# Altium PCB Unit_Type_C.PcbDoc
Units mm, origin at the board's own origin, x right, y up, seen from the top; angles counter-clockwise.
Board outline 20.6 x 43.8 mm, 2 copper layers (Top Layer, Bottom Layer), stack 0.98 mm thick; 1 components, 3 nets, 4 pads, 1 vias.
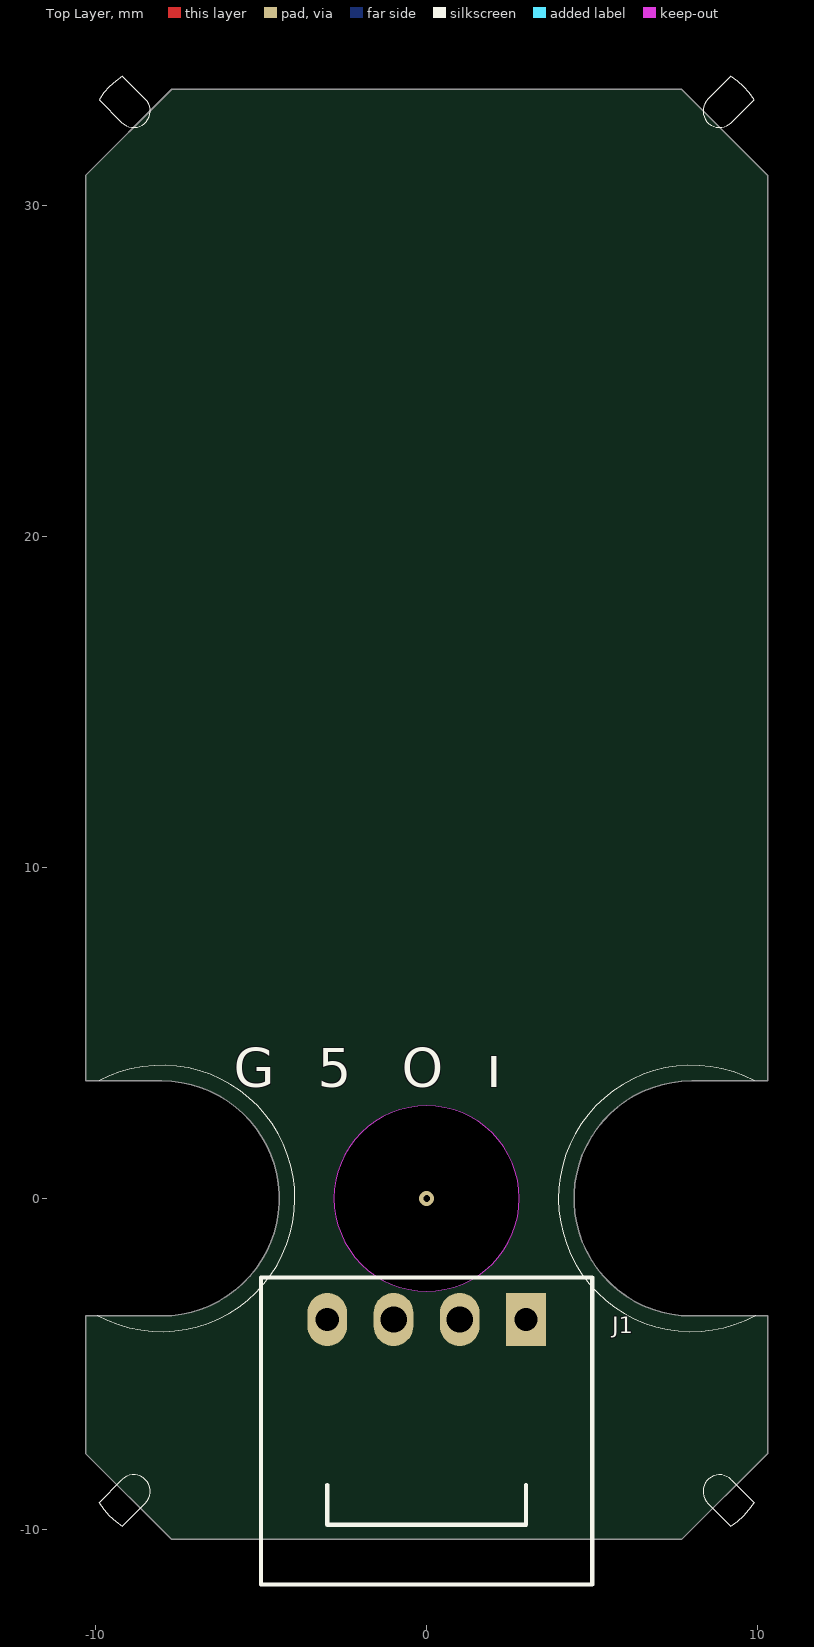
[diagram p0: Top Layer view]
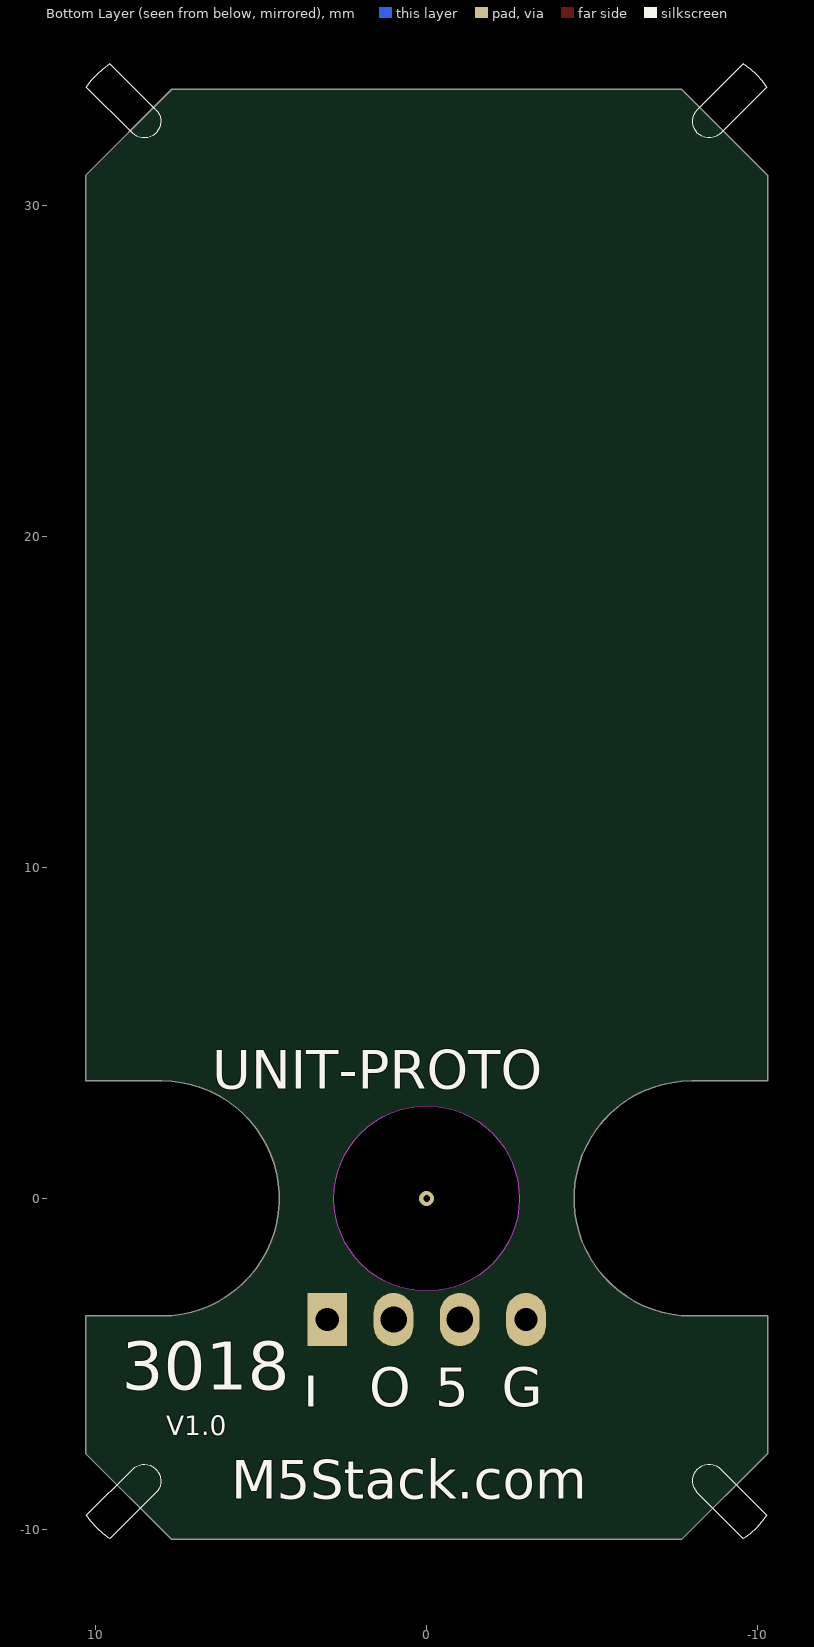
[diagram p1: Bottom Layer view, seen from below]

## Layer stack, top to bottom
Top Solder: solder mask 0.0102, Solder Resist, Dk 3.5
Top Layer: signal copper 0.0356
Dielectric 1: dielectric 0.9086, FR-4, Dk 4.8
Bottom Layer: signal copper 0.0356
Bottom Solder: solder mask 0.0102, Solder Resist, Dk 3.5

## Board outline
-10.3,-3.55 -8,-3.55 ccw(c-8,0) -8,3.55 -10.3,3.55 -10.3,30.9 -7.7,33.5 7.7,33.5 10.3,30.9 10.3,3.55 8,3.55 ccw(c8,0) 8,-3.55 10.3,-3.55 10.3,-7.7 7.7,-10.3 -7.7,-10.3 -10.3,-7.7
cut-out: -2.8,0 ccw(c0,0) 0,-2.8 ccw(c0,0) 2.8,0 ccw(c0,0) 0,2.8 ccw(c0,0)

## Design rules (kind name [scope] priority, off if disabled: settings)
Clearance [All] p1: gap=0.254 ignorepadtopadclearanceinfootprint=FALSE except(0: Arc-Hole Track-Hole SMDPad-Hole THPad-Hole Via-Hole Fill-Hole Poly-Hole Region-Hole Text-Hole)
PolygonConnect [All] p1: connectstyle=Relief reliefconductorwidth=0.254 reliefentries=4 polygonreliefangle="90 Angle" airgapwidth=0.254
RoutingVias [All] p1: holewidth=0.4 width=0.6 viastyle="Through Hole" minholewidth=0.3 minwidth=0.6 maxholewidth=0.4 maxwidth=0.7
SolderMaskExpansion [All] p1: expansion=0.102 istentingtop=FALSE
Width [InNet('No Net')] p1: maxlimit=0.254 minlimit=0.254 preferedwidth=0.254
30 further rules are at their usual default settings.

## Components (designator, comment, footprint, x,y, rotation, side; value= is the part's Value field where it differs from the comment)
J1 "Grove" Grove 0,-9.856 r270 top locked

## Footprints (in the part's own frame and the unit in brackets; to place one, negate y for a bottom-side part, rotate by r counter-clockwise, add the part's x,y. Pads: shape width x height; smd on the part's side, far side on the other; paste and mask are expansions set on the pad)
Grove [mm]
  rect 1.6x1.2 hole 0.7: 1(-6.2,3)
  oval 1.6x1.2 hole 0.8: 2(-6.2,1) 3(-6.2,-1)
  oval 1.6x1.2 hole 0.7: 4(-6.2,-3)
  silkscreen extent -7.47,-5 1.8,5, body extent -7.53,-5.06 1.86,5.06, height 5.1

## Via types
v1: diameter 0.45, hole 0.2, Top Layer to Bottom Layer, tented both sides, 1 vias

## Nets (pads, with @x,y where several pads share a name; then routed paths per layer and width w, separated by ;. In a path a pad name is that pad's centre, name@x,y a point inside that pad or via, vN(x,y) a via of type N, cw(c..) or ccw(c..) an arc to the next point about the centre after c; other vN are vias at no path point)
GND: J1.4
NetC1_2: J1.1
VCC: J1.3
pads on no net: J1.2
copper on no net:
  other v1: 0,0

## Silkscreen, mask and mechanical layers (free items; w line width, h text height)
Top Overlay:
  lines w0.013: -9.942,-3.522 ccw(c-8,0) -9.89,3.55 ; 9.89,3.55 ccw(c8,0) 9.942,-3.522 ; -9.894,-9.187 ccw(c-8,-8) -9.187,-9.894 -8.495,-9.202 ccw(c-8.849,-8.849) -9.202,-8.495 -9.894,-9.187 ; -9.894,33.187 cw(c-8,32) -9.187,33.894 -8.495,33.202 cw(c-8.849,32.849) -9.202,32.495 -9.894,33.187 ; 8.495,-9.202 cw(c8.849,-8.849) 9.202,-8.495 9.894,-9.187 cw(c8,-8) 9.187,-9.894 8.495,-9.202 ; 8.495,33.202 ccw(c8.849,32.849) 9.202,32.495 9.894,33.187 ccw(c8,32) 9.187,33.894 8.495,33.202
  text "G" at -5.826,2.988 h2
  text "5" at -3.286,2.988 h2
  text "O" at -0.746,2.988 h2
  text "I" at 1.794,2.988 h2
Bottom Overlay:
  lines w0.013: -10.275,-9.568 ccw(c-8,-8) -9.568,-10.275 -8.177,-8.884 ccw(c-8.53,-8.53) -8.884,-8.177 -10.275,-9.568 ; -10.275,33.568 cw(c-8,32) -9.568,34.275 -8.177,32.884 cw(c-8.53,32.53) -8.884,32.177 -10.275,33.568 ; 8.177,-8.884 cw(c8.53,-8.53) 8.884,-8.177 10.275,-9.568 cw(c8,-8) 9.568,-10.275 8.177,-8.884 ; 8.177,32.884 ccw(c8.53,32.53) 8.884,32.177 10.275,33.568 ccw(c8,32) 9.568,34.275 8.177,32.884
  text "UNIT-PROTO" at 6.477,2.921 h2
  text "3018" at 9.207,-6.261 h2.5
  text "G" at -2.267,-6.668 h2
  text "5" at -0.267,-6.668 h2
  text "O" at 1.733,-6.668 h2
  text "I" at 3.733,-6.668 h2
  text "V1.0" at 7.861,-7.354 h1
  text "M5Stack.com" at 5.905,-9.462 h2
Mechanical 1:
  circle w0.127: c0,0 r2.8
  lines w0.127: -10.3,-7.7 -7.7,-10.3 7.7,-10.3 10.3,-7.7 10.3,-3.55 8,-3.55 cw(c8,0) 8,3.55 10.3,3.55 10.3,30.9 7.7,33.5 -7.7,33.5 -10.3,30.9 -10.3,3.55 -8,3.55 cw(c-8,0) -8,-3.55 -10.3,-3.55 -10.3,-7.7
Mechanical 13:
  lines w0.127: -10.3,-3.55 -10.3,-6.9 -6.9,-10.3 6.9,-10.3 10.3,-6.9 10.3,-3.55 ; -10.3,30.9 -8.18,33.02 8.18,33.02 10.3,30.9